# Altium PCB Dingo_PCB.PcbDoc
Units mm, origin at the board's own origin, x right, y up, seen from the top; angles counter-clockwise.
Board outline 80 x 40 mm, 2 copper layers (Top Layer, Bottom Layer), stack 1.671 mm thick; 27 components, 6 nets, 50 pads, 0 vias.
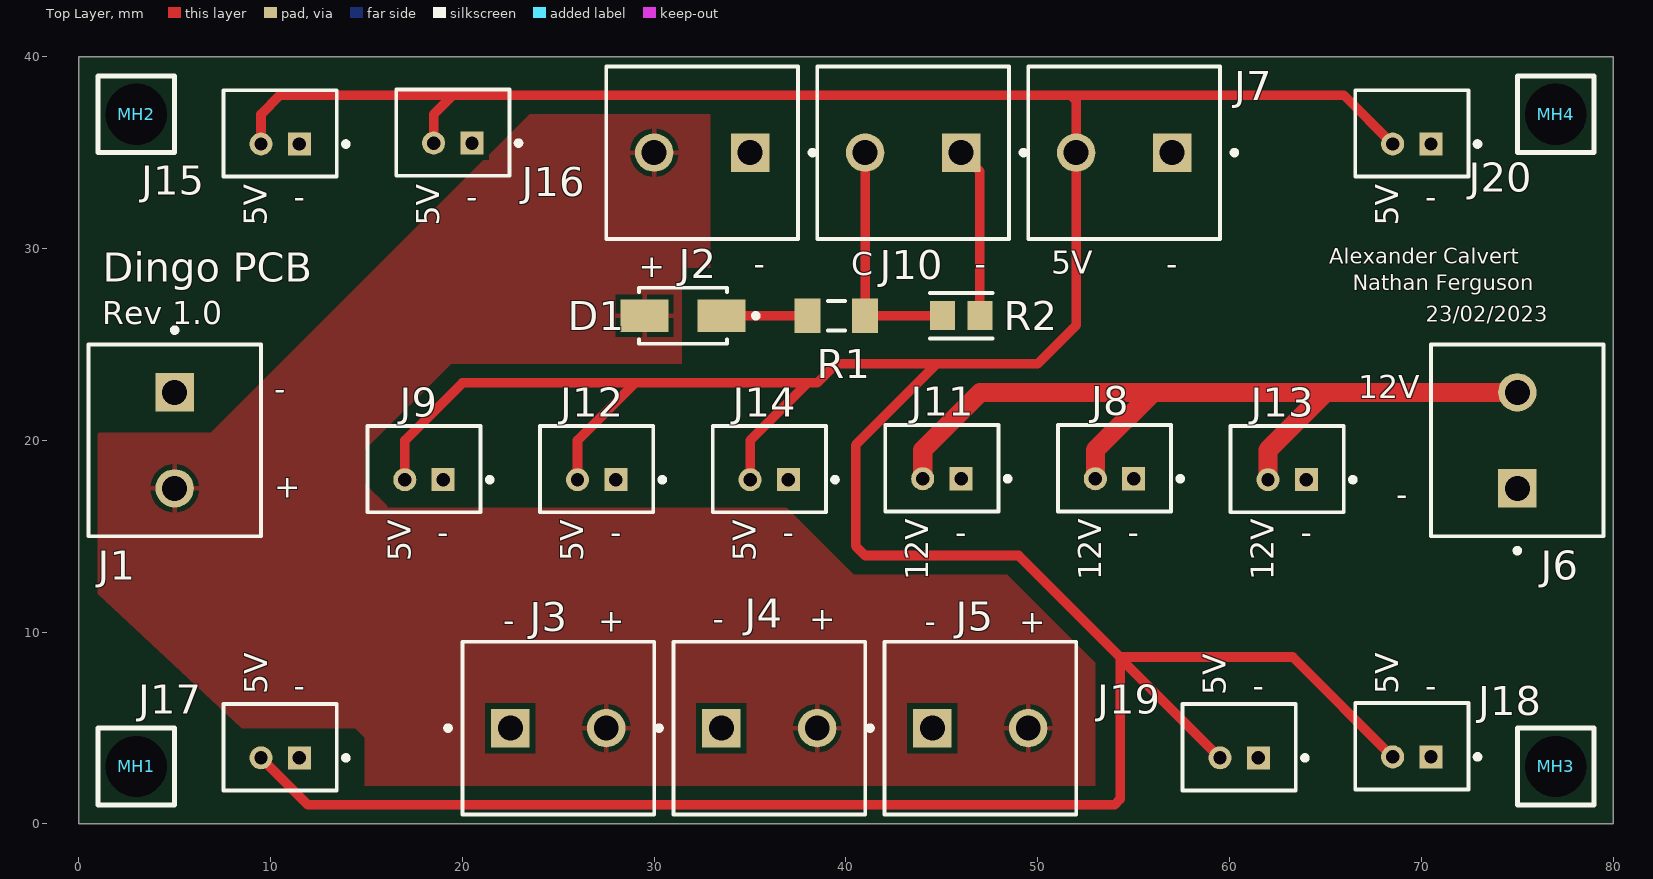
[diagram p0: Top Layer view]
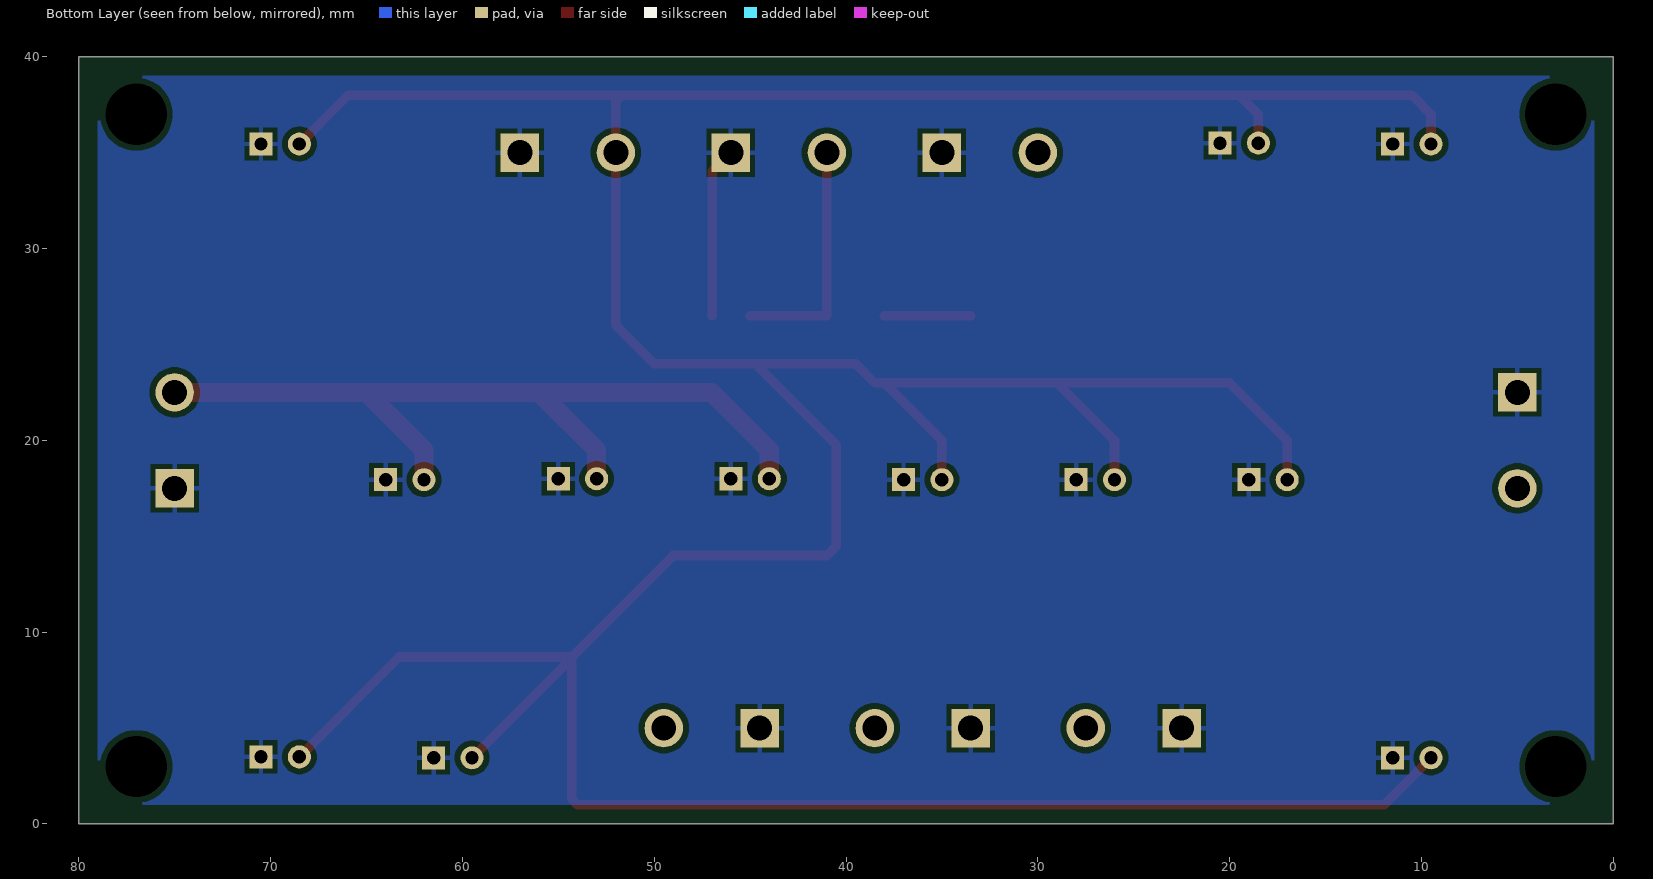
[diagram p1: Bottom Layer view, seen from below]
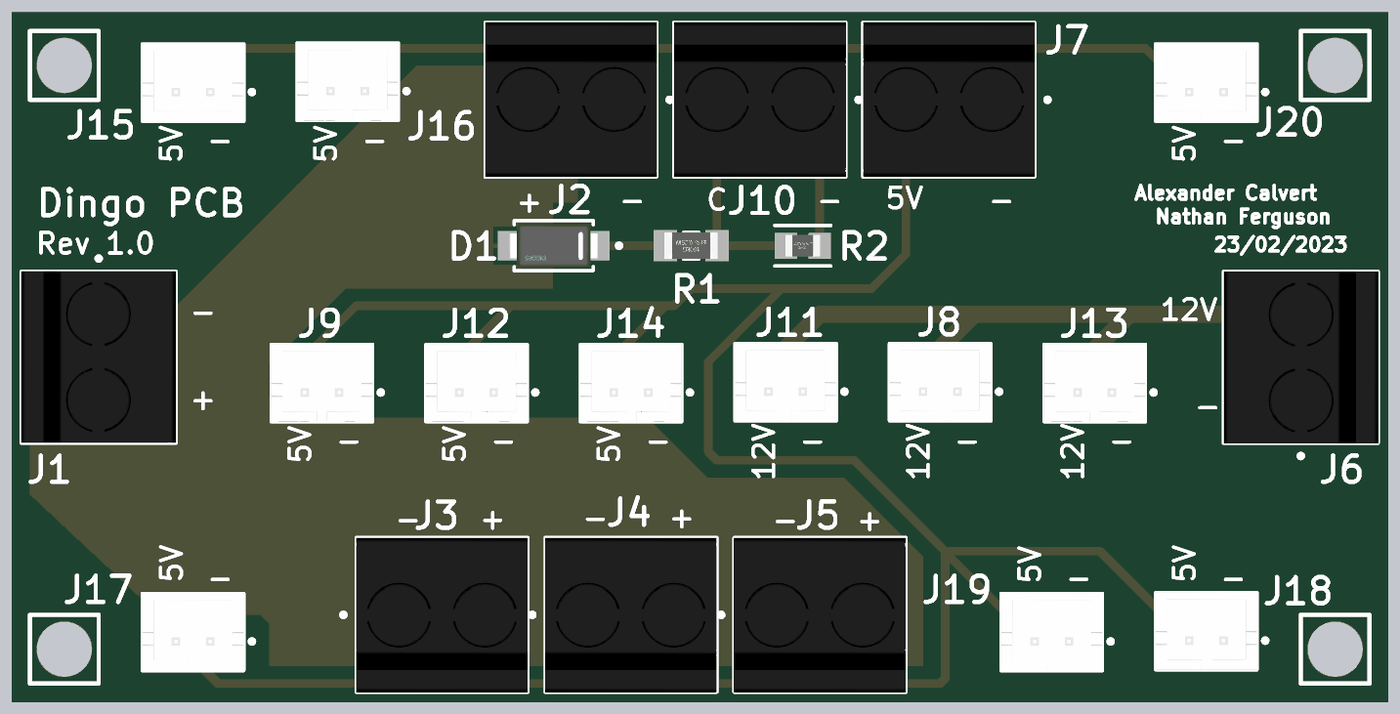
[diagram p2: 3D render of the assembled board from above, using the file's embedded part models]

## Layer stack, top to bottom
Top Solder: solder mask 0.0102, Solder Resist, Dk 3.5
Top Layer: signal copper 0.0356
Dielectric 1: dielectric 1.6, FR-4, Dk 4.8
Bottom Layer: signal copper 0.0356
Bottom Solder: solder mask 0.0102, Solder Resist, Dk 3.5

## Board outline
0,0 80,0 80,40 0,40

## Design rules (kind name [scope] priority, off if disabled: settings)
Clearance [All] p1: gap=0.3 ignorepadtopadclearanceinfootprint=FALSE
HoleSize [All] p1: absolutevalues=TRUE maxlimit=3.5 minlimit=0.025 maxpercent=80.000 minpercent=20.000
PolygonConnect [All] p1: connectstyle=Relief reliefconductorwidth=0.254 reliefentries=4 polygonreliefangle="90 Angle" airgapwidth=0.254
RoutingVias [All] p1: holewidth=0.3 width=0.6 viastyle="Through Hole" minholewidth=0.3 minwidth=0.6 maxholewidth=0.3 maxwidth=0.6
SilkToSolderMaskClearance [IsPad] p1: minsilkscreentomaskgap=0.1 clearancetoexposedcopper=TRUE
SolderMaskExpansion [All] p1: expansion=0.102 istentingtop=FALSE
Width [All] p1: maxlimit=1 minlimit=0.3 preferedwidth=0.5
28 further rules are at their usual default settings.

## Components (designator, comment, footprint, x,y, rotation, side; value= is the part's Value field where it differs from the comment)
D1 "Diode" DIODES_INC_SMA_MFG 31.5,26.5 r180 top
J1 "battery Input" PHOENIX_CONTACT_1935776_0 5,20 r270 top
J2 "Spare connector" PHOENIX_CONTACT_1935776_0 32.5,35 r180 top
J3 "To 7.8V rail" PHOENIX_CONTACT_1935776_0 25,5 r0 top
J4 "To 5V rail" PHOENIX_CONTACT_1935776_0 36,5 r0 top
J5 "To 12V rail" PHOENIX_CONTACT_1935776_0 47,5 r0 top
J6 "12V rail return" PHOENIX_CONTACT_1935776_0 75,20 r90 top
J7 "5V rail return" PHOENIX_CONTACT_1935776_0 54.5,35 r180 top
J8 "12Vout1" JST_0_MFG 54,18.55 r0 top
J9 "5Vout1" JST_0_MFG 18,18.5 r0 top
J10 "TeensyADCport" PHOENIX_CONTACT_1935776_0 43.5,35 r180 top
J11 "12Vout2" JST_0_MFG 45,18.55 r0 top
J12 "5Vout2" JST_0_MFG 27,18.5 r0 top
J13 "12Vout3" JST_0_MFG 63,18.5 r0 top
J14 "5Vout3" JST_0_MFG 36,18.5 r0 top
J15 "Temp1" JST_0_MFG 10.5,36 r0 top
J16 "Temp2" JST_0_MFG 19.5,36.05 r0 top
J17 "Temp3" JST_0_MFG 10.5,4 r0 top
J18 "Temp4" JST_0_MFG 69.5,4.05 r0 top
J19 "Fan1" JST_0_MFG 60.5,4 r0 top
J20 "Fan2" JST_0_MFG 69.5,36 r0 top
MH1 "Mounting Hole Non-Plated 3.2mm" MH3.2mm 3,3 r0 top
MH2 "Mounting Hole Non-Plated 3.2mm" MH3.2mm 3,37 r0 top
MH3 "Mounting Hole Non-Plated 3.2mm" MH3.2mm 77,3 r0 top
MH4 "Mounting Hole Non-Plated 3.2mm" MH3.2mm 77,37 r0 top
R1 "47k" TE_CONNECTIVITY_CRGCQ1206_IPC_A 39.5,26.5 r180 top
R2 "10k" TE_CONNECTIVITY_CRGCQ0805_IPC_A 46,26.5 r180 top

## Footprints (in the part's own frame and the unit in brackets; to place one, negate y for a bottom-side part, rotate by r counter-clockwise, add the part's x,y. Pads: shape width x height; smd on the part's side, far side on the other; paste and mask are expansions set on the pad)
DIODES_INC_SMA_MFG [mm]
  rect 2.5x1.7 smd paste+0 mask+0: 1(-2,0) 2(2,0)
  silkscreen extent -3.93,-1.46 2.3,1.46, body extent -3.35,-1.56 3.35,1.56, height 0.25
JST_0_MFG [mm]
  rect 1.2x1.2 hole 0.7 paste-1000 mask+0: 1(1,-0.55)
  round 1.2 hole 0.7 paste-1000 mask+0: 2(-1,-0.55)
  silkscreen extent -2.95,-2.25 3.55,2.25, body extent -3.05,-2.35 3.05,2.35, height 0.25
MH3.2mm [mm] "Mounting Hole Non-Plated, 3.2mm hole"
  round 1 hole 3.2: ""(0,0)
  silkscreen extent -2,-2 2,2
PHOENIX_CONTACT_1935776_0 [mm]
  rect 2x2 hole 1.3 paste-1000 mask+0: 1(-2.5,0)
  round 2 hole 1.3 paste-1000 mask+0: 2(2.5,0)
  silkscreen extent -5.87,-4.5 5,4.5, body extent -5.18,-4.67 5.18,4.67, height 0.25
TE_CONNECTIVITY_CRGCQ0805_IPC_A [mm]
  rect 1.306x1.51 smd paste+0 mask+0: 1(-0.976,0) 2(0.976,0)
  silkscreen extent -1.63,-1.18 1.63,1.18, body extent -2.13,-1.25 2.13,1.25, height 0.25
TE_CONNECTIVITY_CRGCQ1206_IPC_A [mm]
  rect 1.356x1.81 smd paste+0 mask+0: 1(-1.501,0) 2(1.501,0)
  silkscreen extent -0.45,-0.77 0.45,0.77, body extent -2.68,-1.4 2.68,1.4, height 0.25

## Part data
D1: library part B160-13-F
J1 J2 J3 J4 J5 J6 J7 J10: library part Conn_Phoenix_Contact_1935776_eec, "CONN 2 Position Wire to Board Terminal Block Horizontal with Board 0.197\" (5.00mm) Through Hole", Digikey Part Number=277-6405-ND, Manufacturer="Phoenix Contact", Mouser Part Number=651-1935776, Package="CONN_PTH_TERMINAL BLOCK", Part Number=1935776, Temperature=to, Voltage=300V, ComponentLink1Description=Upverter, ComponentLink1URL=https://upverter.com/upn/revision/23a85baadd8e96ab/, ComponentLink2Description=Datasheet, ComponentLink2URL=http://select.phoenixcontact.com/phoenix/dwld/00846397_00_fam.pdf?cp=y&asid2=080208969559730, Digikey Description="CONN 2 Position Wire to Board Terminal Block Horizontal with Board 0.197\" (5.00mm) Through Hole", helpURL=https://upverter.com/upn/revision/23a85baadd8e96ab/, Is Female=yes, Lead Free=yes, Price=0.394437234895, RoHS=TRUE, Supplier 1=Digi-Key, Supplier 2=Mouser, Supplier Part Number 1=277-6405-ND, Supplier Part Number 2=651-1935776
J8 J9 J11 J12 J13 J14 J15 J16 J17 J18 J19 J20: library part B2B-PH-K-S_LF_SN
MH1 MH2 MH3 MH4: library part MH3P2MM, "Mounting Hole Non-Plated 3.2mm drill hole"
R1: library part CRGCQ1206F47K
R2: library part CRGCQ0805F10K

## Nets (pads, with @x,y where several pads share a name; then routed paths per layer and width w, separated by ;. In a path a pad name is that pad's centre, name@x,y a point inside that pad or via, vN(x,y) a via of type N, cw(c..) or ccw(c..) an arc to the next point about the centre after c; other vN are vias at no path point)
5V: J7.2 J9.2 J12.2 J14.2 J15.2 J16.2 J17.2 J18.2 J19.2 J20.2 | length 233.7
  Top Layer w0.5: J17.2 11.95,1 54,1 54.293,1.293 54.293,8.657 ; J15.2 9.5,37 10.5,38 19.5,38 ; J9.2 17,20 20,23 29,23 ; J16.2 18.5,37 19.5,38 ; J12.2 26,20 29,23 ; J14.2 35,20 38,23 ; J19.2 54.293,8.657 ; J18.2 63.293,8.707 54.293,8.707 ; J20.2 65.95,38 51.707,38 ; 19.5,38 51.707,38 ; 29,23 38,23 ; 38,23 38.5,23 39.5,24 44.75,24 ; 44.75,24 50,24 52,26 J7.2 52,37.707 51.707,38 ; 44.75,24 40.5,19.75 40.5,14.5 41,14 49,14 54.293,8.707 ; 54.293,8.657 54.293,8.707
12V: J6.2 J8.2 J11.2 J13.2 | length 45.3
  Top Layer w1: J11.2 44,19.5 47,22.5 56,22.5 ; J8.2 53,19.5 56,22.5 ; J13.2 62,19.5 65,22.5 ; J6.2 65,22.5 ; 56,22.5 65,22.5
BattVolt: D1.2 J1.2 J2.2 J3.2 J4.2 J5.2
GND: J1.1 J2.1 J3.1 J4.1 J5.1 J6.1 J7.1 J8.1 J9.1 J10.1 J11.1 J12.1 J13.1 J14.1 J15.1 J16.1 J17.1 J18.1 J19.1 J20.1 R2.1 | length 8.9
  Top Layer w0.5: J10.1 46.976,34.024 R2.1
NetD1_1: D1.1 R1.2 | length 4.5
  Top Layer w0.5: D1.1 R1.2
VoltCheck: J10.2 R1.1 R2.2 | length 12.5
  Top Layer w0.5: R1.1 R2.2 ; R1.1 J10.2@41.001,34.999
pads on no net: MH1. MH2. MH3. MH4.

## Polygon pours and split planes (outlines as drawn)
BattVolt on Top Layer "BATTVOLT_L01_P009" (solid, pour order 9): 0.917,20.394 1,20.311 1,12 8.5,5 14.417,5 14.917,4.5 14.917,2 53,2 53,8.417 48.417,13 40.417,13 36.917,16.5 16.083,16.5 16.083,16.584 14.917,17.75 14.917,19.5 19.417,24 31.447,24 31.447,29 32.917,29 32.917,37 23.5,37 6.894,20.394 3.959,20.394
GND on Bottom Layer "GND_L02_P000" (solid, pour order 0): 1,39 79,39 79,1 1,1

## Silkscreen, mask and mechanical layers (free items; w line width, h text height)
Top Overlay:
  text "-" at 11.2,32.1 h1.2
  text "-" at 20.2,32.1 h1.2
  text "-" at 70.2,32.1 h1.2
  text "5V" at 9.8,31.2 h1.2 r90
  text "5V" at 18.8,31.2 h1.2 r90
  text "5V" at 68.8,31.2 h1.2 r90
  text "Alexander Calvert" at 65.2,29.2 h0.8
  text "5V" at 50.7,28.7 h1.2
  text "-" at 35.2,28.6 h1.2
  text "C" at 40.272,28.601 h1.2
  text "-" at 46.7,28.6 h1.2
  text "-" at 56.7,28.6 h1.2
  text "+" at 29.2,28.5 h1.2
  text "Dingo PCB" at 1.254,28.262 h1.52
  text "Nathan Ferguson" at 66.413,27.815 h0.8
  text "23/02/2023" at 70.234,26.185 h0.8
  text "Rev 1.0" at 1.227,26.066 h1.2
  text "12V" at 66.7,22.2 h1.2
  text "-" at 10.2,22.1 h1.2
  text "+" at 10.2,17 h1.2
  text "-" at 68.7,16.6 h1.2
  text "-" at 18.7,14.6 h1.2
  text "-" at 27.7,14.6 h1.2
  text "-" at 36.7,14.6 h1.2
  text "-" at 45.7,14.6 h1.2
  text "-" at 54.7,14.6 h1.2
  text "-" at 63.7,14.6 h1.2
  text "5V" at 17.3,13.7 h1.2 r90
  text "5V" at 26.3,13.7 h1.2 r90
  text "5V" at 35.3,13.7 h1.2 r90
  text "12V" at 44.3,12.7 h1.2 r90
  text "12V" at 53.3,12.7 h1.2 r90
  text "12V" at 62.3,12.7 h1.2 r90
  text "-" at 33.051,10.105 h1.2
  text "+" at 38.076,10.12 h1.2
  text "+" at 27.075,10.029 h1.2
  text "-" at 22.141,10.014 h1.2
  text "-" at 44.103,9.975 h1.2
  text "+" at 49.023,9.963 h1.2
  text "5V" at 9.82,6.772 h1.2 r90
  text "5V" at 68.796,6.758 h1.2 r90
  text "5V" at 59.797,6.708 h1.2 r90
  text "-" at 11.2,6.6 h1.2
  text "-" at 61.2,6.6 h1.2
  text "-" at 70.2,6.6 h1.2
Board:
  the board outline again, w0.2